# Altium PCB LightsaberBOPIT.PcbDoc
Units mil, origin at the board's own origin, x right, y up, seen from the top; angles counter-clockwise.
Board outline 2490 x 3395 mil, 2 copper layers (Top Layer, Bottom Layer); 10 components, 15 nets, 64 pads, 4 vias.
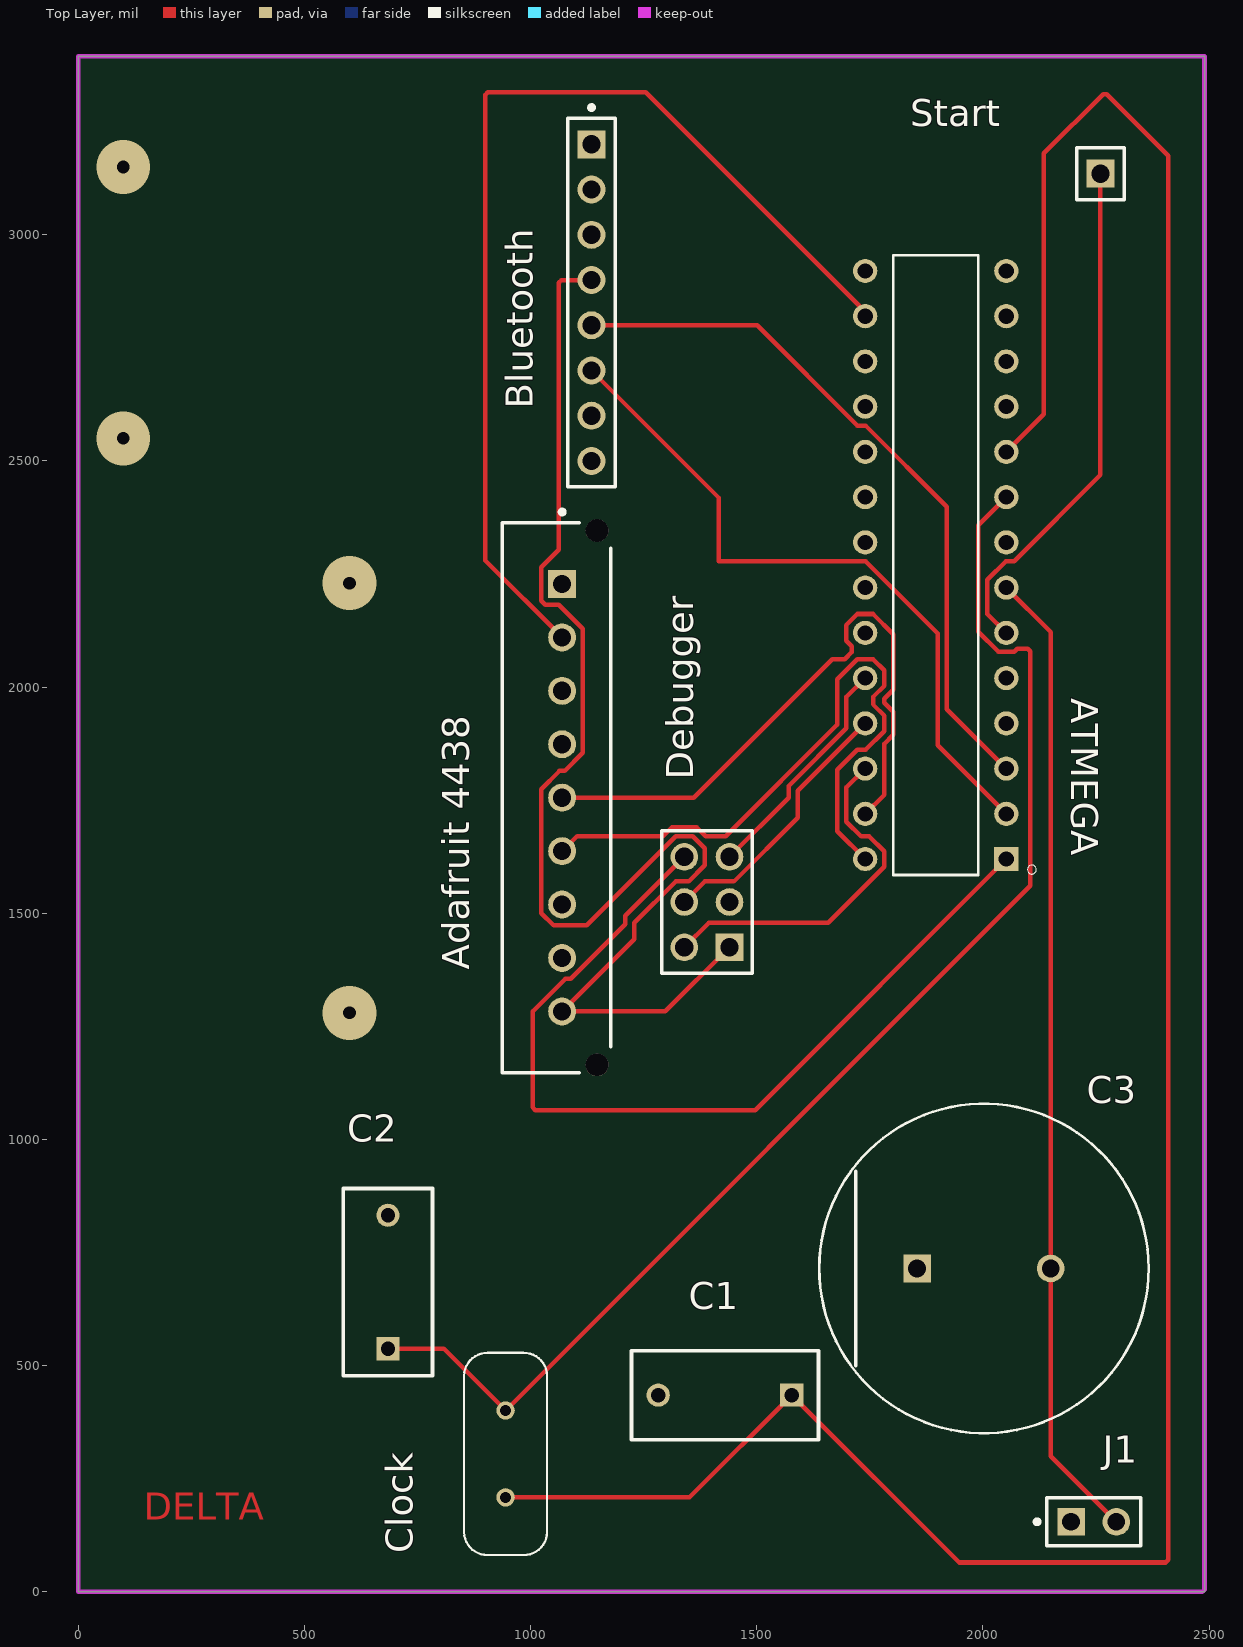
[diagram p0: Top Layer view]
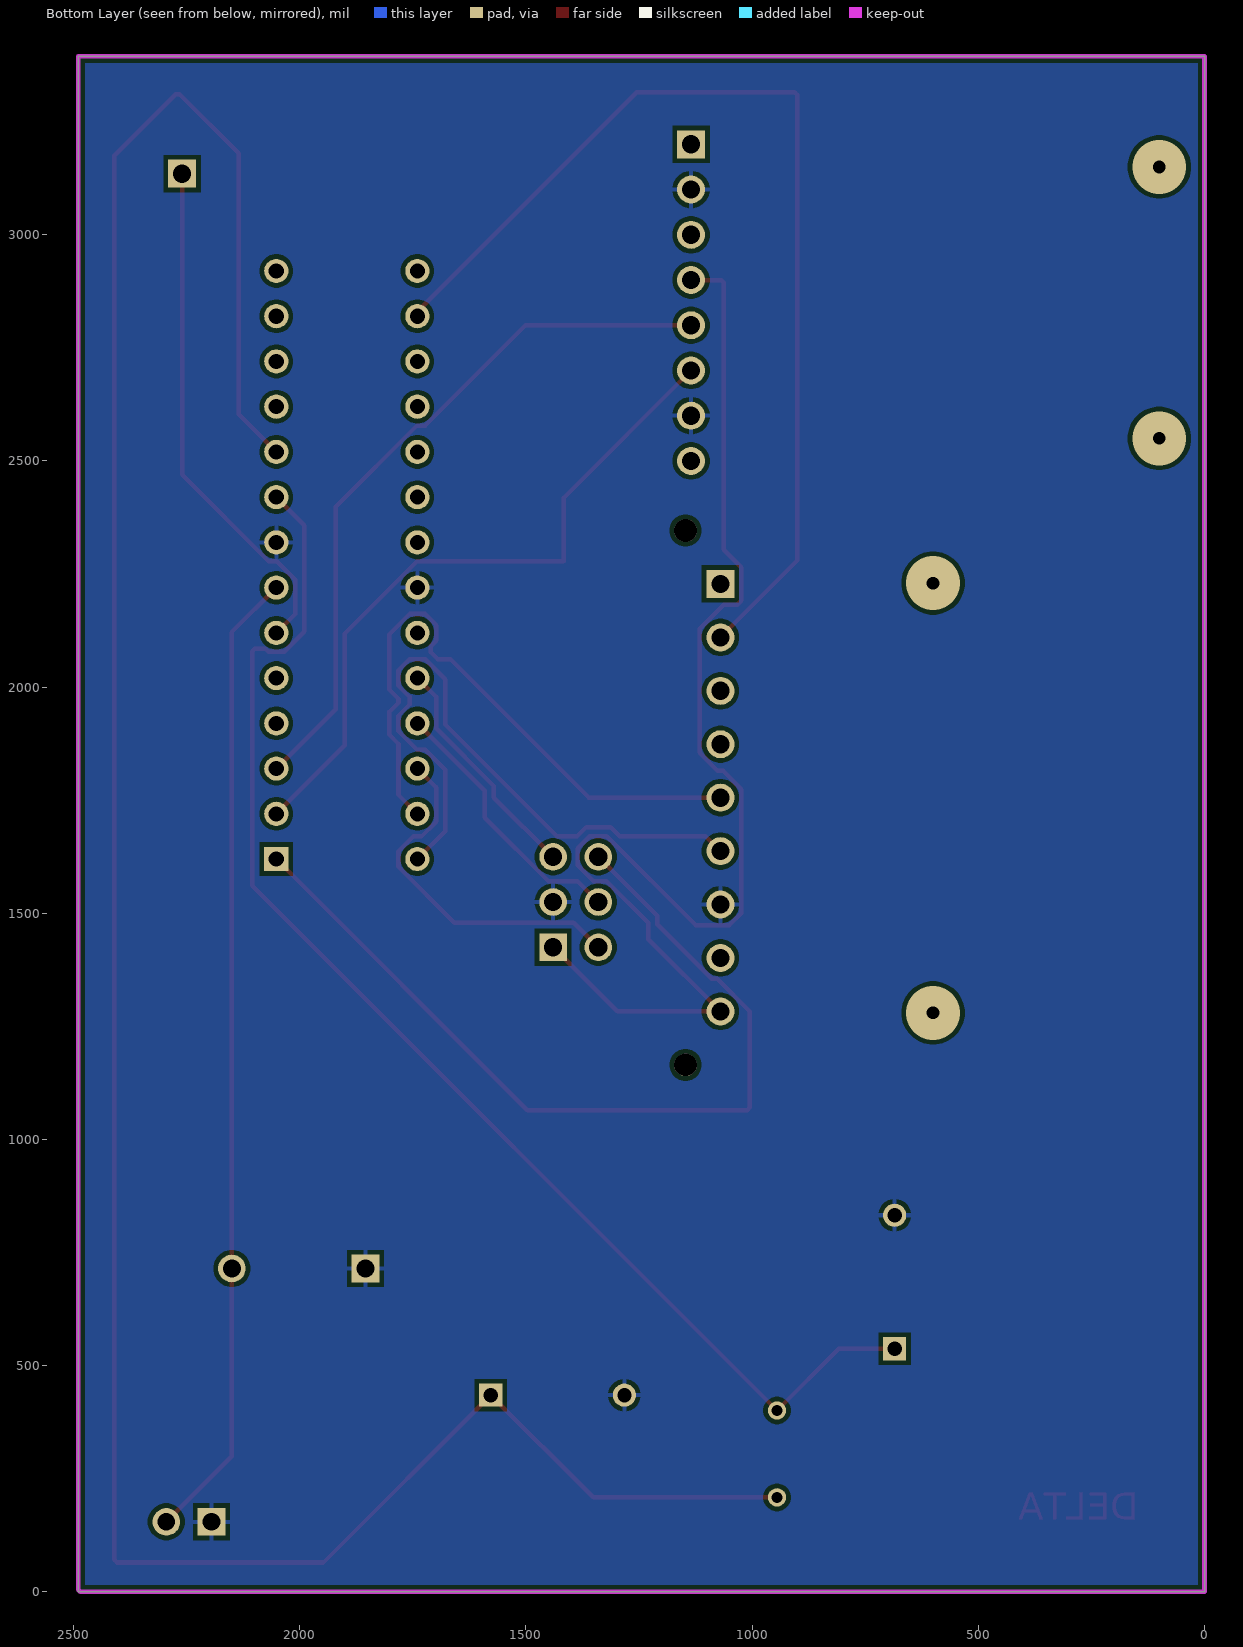
[diagram p1: Bottom Layer view, seen from below]
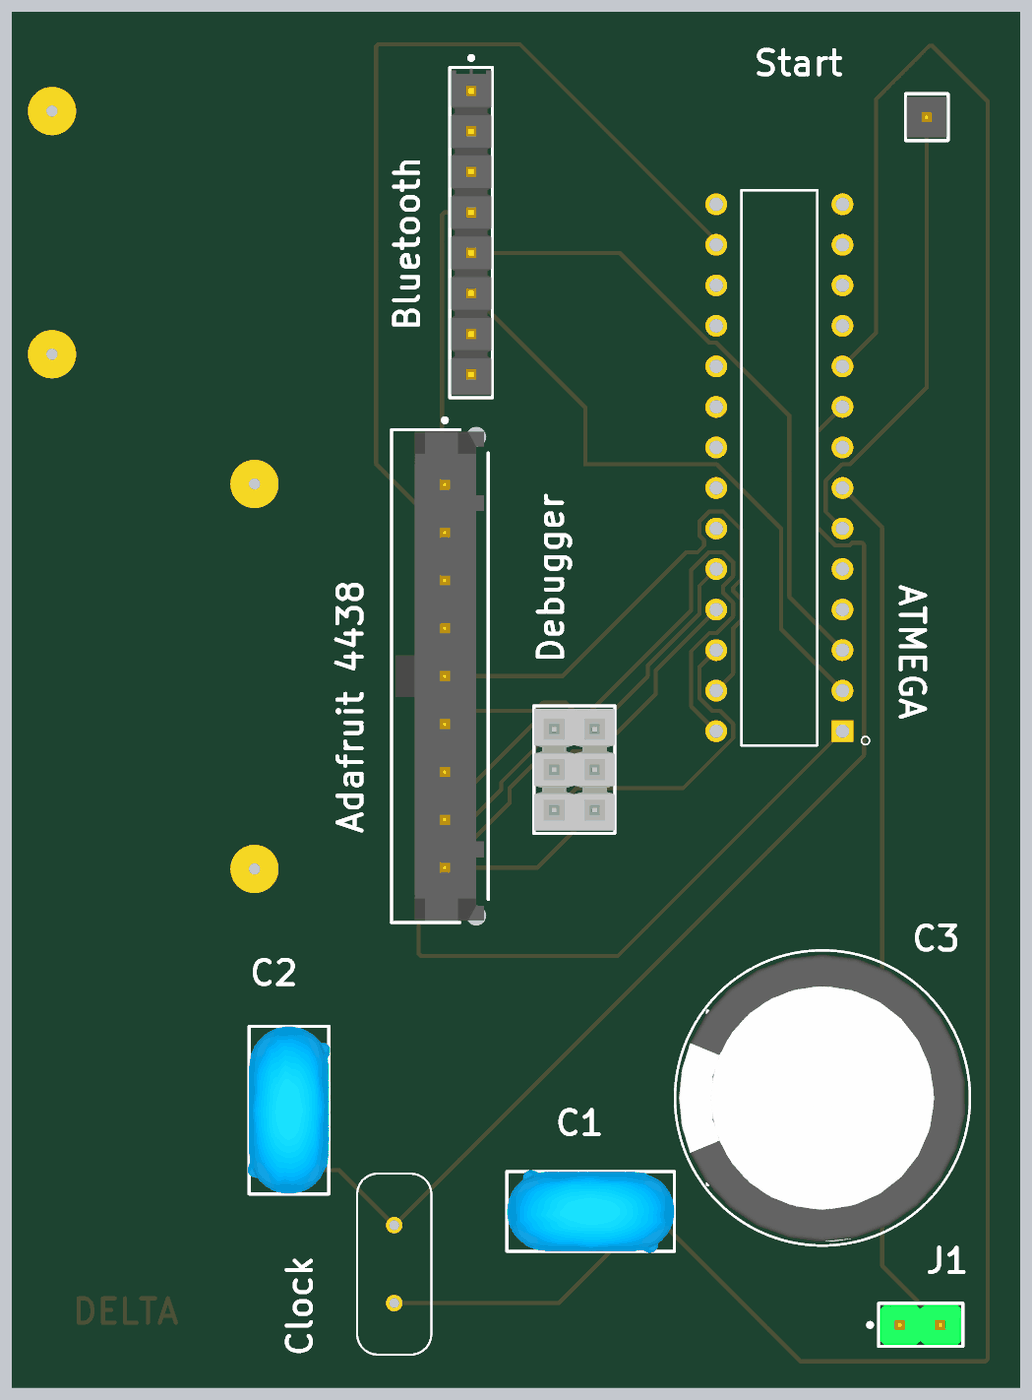
[diagram p2: 3D render of the assembled board from above, using the file's embedded part models]

## Layer stack, top to bottom
Top Solder: solder mask 0.4, Solder Resist, Dk 3.5
Top Layer: signal copper 1.4
Dielectric 1: dielectric 12.6, FR-4, Dk 4.8
Bottom Layer: signal copper 1.4
Bottom Solder: solder mask 0.4, Solder Resist, Dk 3.5

## Board outline
0,0 2490,0 2490,3395 0,3395

## Design rules (kind name [scope] priority, off if disabled: settings)
Clearance [All] p1: gap=10 ignorepadtopadclearanceinfootprint=FALSE
PolygonConnect [All] p1: connectstyle=Relief reliefconductorwidth=10 reliefentries=4 polygonreliefangle="90 Angle" airgapwidth=10
RoutingVias [All] p1: holewidth=28 width=50 viastyle="Through Hole" minholewidth=28 minwidth=50 maxholewidth=28 maxwidth=50
SolderMaskExpansion [All] p1: expansion=0 istentingtop=FALSE
SupplyNets "Schematic Supply Nets" [InNet('GND')] p1: voltage=0.000
Width [All] p1: maxlimit=10 minlimit=10 preferedwidth=10
30 further rules are at their usual default settings.

## Classes and differential pairs
component class Sheet1: " " "Adafruit 4438" C1 C2 C3 Clock Debugger J1 Start

## Components (designator, comment, footprint, x,y, rotation, side; value= is the part's Value field where it differs from the comment)
"Adafruit 4438" "43650-0916" FP-43650-0916-MFG 1057.6,1755.67 r90 top
ATMEGA "ATMEGA328P-PU" DIP794W46P254L2967H457Q28B 1895.91,2270 r180 top (schematic designator U?)
Bluetooth "TSW-108-08-G-S" FP-TSW-108-08-G-S-MFG 1135,2850 r270 top
C1 "CS11ZU2GA472MYGKA" FP-CS11ZU2GA472MYGKA-MFG 1430,435 r180 top
C2 "CS11ZU2GA472MYGKA" FP-CS11ZU2GA472MYGKA-MFG 685,685 r90 top
C3 "EEUFK1V332S" FP-RAD-TH-D_18_0_5-L_25_2-MFG 2002.36,715 r0 top (schematic designator C?)
Clock "ECS-184-18-4" XTAL_ECS-184-18-4 945,305 r270 top
Debugger "TSW-103-08-G-D" SMTC-TSW-103-08-X-D 1440,1425 r90 top
J1 "826629-2" FP-826629-2-MFG 2245,155 r0 top
Start "TSW-101-07-L-S" FP-TSW-101-07-L-S-MFG 2260,3135 r90 top

## Footprints (in the part's own frame and the unit in brackets; to place one, negate y for a bottom-side part, rotate by r counter-clockwise, add the part's x,y. Pads: shape width x height; smd on the part's side, far side on the other; paste and mask are expansions set on the pad)
DIP794W46P254L2967H457Q28B [mm]
  rect 1.358x1.358 hole 0.85: 1(-3.96,16.51)
  round 1.358 hole 0.85: 2(-3.96,13.97) 3(-3.96,11.43) 4(-3.96,8.89) 5(-3.96,6.35) 6(-3.96,3.81) 7(-3.96,1.27) 8(-3.96,-1.27) 9(-3.96,-3.81) 10(-3.96,-6.35) 11(-3.96,-8.89) 12(-3.96,-11.43) 13(-3.96,-13.97) 14(-3.96,-16.51) 15(3.96,-16.51) 16(3.96,-13.97) 17(3.96,-11.43) 18(3.96,-8.89) 19(3.96,-6.35) 20(3.96,-3.81) 21(3.96,-1.27) 22(3.96,1.27) 23(3.96,3.81) 24(3.96,6.35) 25(3.96,8.89) 26(3.96,11.43) 27(3.96,13.97) 28(3.96,16.51)
  silkscreen extent -5.65,-17.4 2.38,17.4
FP-43650-0916-MFG [mm]
  rect 1.57x1.57 hole 1.02 paste-2539.97 mask+0: 1(12,-0.315)
  round 1.57 hole 1.02 paste-2539.97 mask+0: 2(9,-0.315) 3(6,-0.315) 4(3,-0.315) 5(0,-0.315) 6(-3,-0.315) 7(-6,-0.315) 8(-9,-0.315) 9(-12,-0.315)
  round 1.27 hole 1.27 unplated paste-2539.97 mask+0: ""(-15,-2.275) ""(15,-2.275)
  silkscreen extent -15.44,-3.04 16.16,3.04, body extent -15.74,-3.14 15.74,3.14, height 0.25
FP-826629-2-MFG [mm]
  rect 1.55x1.55 hole 1 paste-2539.97 mask+0: 1(-1.27,0)
  round 1.55 hole 1 paste-2539.97 mask+0: 2(1.27,0)
  silkscreen extent -3.3,-1.35 2.64,1.35, body extent -2.74,-1.45 2.74,1.45, height 0.25
FP-CS11ZU2GA472MYGKA-MFG [mm]
  rect 1.3x1.3 hole 0.8 paste-2539.97 mask+0: 1(-3.75,0)
  round 1.3 hole 0.8 paste-2539.97 mask+0: 2(3.75,0)
  silkscreen extent -5.25,-2.5 5.25,2.5, body extent -5.35,-2.6 5.35,2.6, height 0.25
FP-RAD-TH-D_18_0_5-L_25_2-MFG [mm]
  rect 1.55x1.55 hole 1 paste-2539.97 mask+0: 1(-3.75,0)
  round 1.55 hole 1 paste-2539.97 mask+0: 2(3.75,0)
  silkscreen extent -9.25,-9.25 9.25,9.25, body extent -9.35,-9.35 9.35,9.35, height 0.25
FP-TSW-101-07-L-S-MFG [mm]
  rect 1.57x1.57 hole 1.02 paste-2539.97 mask+0: 1(0,0)
  silkscreen extent -1.46,-1.34 1.46,1.34, body extent -1.56,-1.44 1.56,1.44, height 0.25
FP-TSW-108-08-G-S-MFG [mm]
  rect 1.57x1.57 hole 1.02 paste-2539.97 mask+0: 1(-8.89,0)
  round 1.57 hole 1.02 paste-2539.97 mask+0: 2(-6.35,0) 3(-3.81,0) 4(-1.27,0) 5(1.27,0) 6(3.81,0) 7(6.35,0) 8(8.89,0)
  silkscreen extent -11.07,-1.34 10.35,1.34, body extent -10.45,-1.44 10.45,1.44, height 0.25
SMTC-TSW-103-08-X-D [mm] ".025 SQ Post Terminal Strip Assembly, 2x3 Pins, Vertical, 2.54mm Pitch, Male"
  rect 1.55x1.55 hole 1.02: 1(0,0)
  round 1.55 hole 1.02: 2(0,2.54) 3(2.54,0) 4(2.54,2.54) 5(5.08,0) 6(5.08,2.54)
  silkscreen extent -1.46,-1.27 6.54,3.81, body extent -1.27,-1.27 6.35,3.81, height 8.38
XTAL_ECS-184-18-4 [mm]
  round 1.03 hole 0.63: 1(-2.44,0) 2(2.44,0)
  silkscreen extent -5.68,-2.33 5.68,2.33

## Part data
"Adafruit 4438": library part CMP-00257-00277538-1, "43650-0916 Conn Power HDR 9 POS 3mm Solder ST Thru-Hole 9 Terminal 1 Port Micro-Fit 3.0™ Frame", Color=Black, Current Rating=5A, Manufacturer Lifecycle Status=ACTIVE, Max Operating Temperature=105°C, Max Voltage Rating (DC)=250.25kV, Min Operating Temperature=-40°C, Voltage Rating=600V, Connector Type="Male Pin", Contact Gender=Male, Contact Material=Brass, Contact Plating=Gold, Country of Origin=US, Fastening Type=Ramp, Gender=Male, Glow Wire Compliant=Compliant, Halogen Free="Low Halogen", Housing Color=Black, Housing Material=Thermoplastic, Lead Free="Contains Lead", Lead Pitch=3mm, Lifecycle Status=Production, Mount="Through Hole", NexarPartId=277538, Number of Circuits=9, Number of Contacts=9, Number of Positions=9, Number of Rows=1, Orientation=Vertical, Pitch=3mm, Plating=Tin, RoHS=Compliant, Schedule B=8536695050, Termination=Press-Fit
ATMEGA: "ATmega Series 20 MHz 32 KB Flash 2 KB SRAM 8-Bit Microcontroller - DIP-28", Package=None, Availability=Unavailable, MP=ATMEGA328P-PU, Price=None
Bluetooth: library part CMP-02766-000001-1, "CONN HEADER VERT 8POS 2.54MM", Manufacturer=Samtec, Temperature="-55°C to +125°C", Temperature Range High=+125°C, Temperature Range Low=-55°C, Automotive=No, Category=Conn, ComponentLink2Description=Datasheet, ComponentLink2URL=http://suddendocs.samtec.com/catalog_english/tsw_th.pdf, Conn Gender=Male, Conn Orientation=Straight, Contact Material=Gold,Nickel, Device Class L1=Connectors, Device Class L2="Headers and Wire Housings", Device Class L3=unset, Digikey Description="CONN HEADER VERT 8POS 2.54MM", Footprint Url=http://suddendocs.samtec.com/prints/tsw-xxx-xx-x-x-xx-xxx-footprint.pdf, Height=8.71mm, Lead Free=Yes, Manufacturer Part Number=TSW-108-08-G-S, Mouser Description="TSW - Samtec 2.54mm Pin Header 13.46mm Overall Pin Length 5.08mm Tail", Number of Contacts=8, Number of Rows=1, Octopart=https://octopart.com/tsw-108-08-g-s-samtec-272653, Package=TSW-108-08-G-S, Pitch=2.54mm, RoHS=TRUE
C1 C2: library part CMP-00600-33723007-1, "CS11ZU2GA472MYGKA Cap Ceramic 0.0047uF 440VAC Z5U 20% (10.5 X 5mm) Radial 7.5mm 125°C T/R", Capacitance=4.7nF, Case/Package=Radial, Manufacturer Lifecycle Status="PRODUCTION (NOT RECOMMENDED FOR NEW DESIGN)", Max Operating Temperature=125°C, Min Operating Temperature=-40°C, Ratings="AEC-Q200, X1, Y2", Tolerance=20%, Height=14.5mm, Height - Seated (Max)=14.5034mm, Lead Pitch=7.493mm, Lead/Base Style=Straight, Lifecycle Status=NRND, Material=Ceramic, Max Thickness=5mm, Mount="Through Hole", NexarPartId=33723007, Packaging=Bulk, RoHS=Compliant, Thickness=5.0038mm
C3: library part CMP-05427-000163-1, "Aluminum Electrolytic Capacitors (Radial Lead Type) AEC-Q200 Qualified 3300uF ±20% 35V", Capacitance=3.3mF, Case/Package=Radial, Dielectric Material=Aluminium, Max Operating Temperature=105°C, Min Operating Temperature=-55°C, Package Quantity=50, Ripple Current=2.85A, Tolerance=20%, Voltage=35V, Construction=RADIAL, Diameter=18mm, Height=25mm, Lead Diameter=0.8mm, Lead Pitch=7.5mm, Length=25mm, Life (Hours)=5000Hour, Mount="Through Hole", Number of Pins=2, Packaging=Bulk, Radiation Hardening=No, REACH SVHC="No SVHC", RoHS Compliant=Yes, Series=FK, Termination=Radial, Voltage Rating=35V, Voltage Rating (DC)=35V
Clock: Package=None, Availability=Unavailable, MP=ECS-184-18-4, Price=None
Debugger: library part CMP-1024-00338-1, "0.025\" SQ Post Header, Through-hole, Vertical, -55 to 125 degC, 2.54 mm Pitch, 6-Pin, Male, RoHS", Manufacturer=Samtec, Temperature Range="-55 to 125 degC", ComponentLink1Description="Manufacturer URL", ComponentLink1URL=http://www.samtec.com, ComponentLink2Description=Datasheet, ComponentLink2URL=http://www.samtec.com/documents/webfiles/pdf/TSW_TH.PDF, ComponentLink3Description="Package Specification", ComponentLink3URL=http://www.samtec.com/documents/webfiles/cpdf/TSW-XXX-XX-XXX-X-XX-XXX-MKT.pdf, DatasheetVersion=F-214, Mounting Technology=Through-hole, Orientation=Vertical, PackageDescription=".025[0.64] SQ. Post Terminal Strip Assembly", PackageReference=TSW-103-08-X-D, PackageVersion="DM, 8/1988", PartNumber=TSW-103-08-G-D, Pitch="2.54 mm", RoHS=True
J1: library part CMP-05178-000003-1, "CONN HEADER VERT 2POS 2.54MM", RoHS Compliant=Yes
Start: library part CMP-02766-001775-1, "CONN HEADER VERT 1POS", Color=Black, Flammability Rating="UL94 V-0", Max Current Rating=7.6A, Max Operating Temperature=125°C, Max Voltage Rating (AC)=550V, Min Operating Temperature=-55°C, Connector Type=Header, Contact Finish - Mating=GOLD, Contact Material=Bronze, Contact Mating Length=0.23inch, Contact Plating=Gold, Contact Shape=Square, Contact Type="Male Pin", Depth=2.54mm, Fastening Type=Pull, Gender=Male, Housing Color=Black, Housing Material=Polyester, Insulation Color=Black, Insulation Material=PBT, Lead Free="Lead Free", Length=2.54mm, Mount="Through Hole", Number of Contacts=1, Number of Positions=1, Number of Rows=1, Orientation=Straight, Packaging=Bulk, Radiation Hardening=No, Reach SVHC Compliant=Yes, RoHS Compliant=Yes, Series=TSW, Termination=Solder, Width=2.54mm

## Via types
v1: diameter 119, hole 28, Top Layer to Bottom Layer, 4 vias

## Nets (pads, with @x,y where several pads share a name; then routed paths per layer and width w, separated by ;. In a path a pad name is that pad's centre, name@x,y a point inside that pad or via, vN(x,y) a via of type N, cw(c..) or ccw(c..) an arc to the next point about the centre after c; other vN are vias at no path point)
GND: "Adafruit 4438.7" ATMEGA.8 ATMEGA.22 Bluetooth.2 Bluetooth.7 C1.2 C2.2 C3.1 Debugger.3 J1.1
"NetAdafruit 4438_2": "Adafruit 4438.2" ATMEGA.16 | length 2322.9
  Top Layer w10: 1070,2110 900,2280 900,3309.14 905.86,3315 1255,3315 1740,2830 ATMEGA.16
"NetAdafruit 4438_5": "Adafruit 4438.5" ATMEGA.27 | length 1409.7
  Top Layer w10: 1070,1755.67 1360.67,1755.67 1666.73,2061.73 1694.43,2061.73 1710.29,2077.59 1710.29,2090.69 1698.27,2102.71 1698.27,2137.29 1722.71,2161.73 1757.29,2161.73 1801.73,2117.29 1801.73,1994.43 1781.73,1974.43 1781.73,1965.57 1801.73,1945.57 1801.73,1894.43 1781.73,1874.43 1781.73,1761.73 ATMEGA.27
"NetAdafruit 4438_6": "Adafruit 4438.6" ATMEGA.28 | length 1489.2
  Top Layer w10: 1070,1637.56 1102.95,1670.51 1292.86,1670.51 1312.86,1690.51 1367.14,1690.51 1387.14,1670.51 1431.49,1670.51 1678.27,1917.29 1678.27,2017.29 1722.71,2061.73 1757.29,2061.73 1781.73,2037.29 1781.73,2002.71 1757.29,1978.27 1757.29,1961.73 1781.73,1937.29 1781.73,1902.71 1740.75,1861.73 1722.71,1861.73 1678.27,1817.29 1678.27,1681.73 ATMEGA.28
"NetAdafruit 4438_9": "Adafruit 4438.9" Bluetooth.4 Debugger.1 | length 2986.9
  Top Layer w10: Bluetooth.4 1068.57,2900 1062.72,2894.14 1062.72,2303.85 1024.09,2265.23 1024.09,2190.99 1032.88,2182.2 1062.72,2182.2 1115.91,2129.01 1115.91,1854.76 1075.86,1814.72 1064.13,1814.72 1024.09,1774.68 1024.09,1500.43 1050.99,1473.54 1124.18,1473.54 1321.15,1670.51 1358.85,1670.51 1385.51,1643.85 1385.51,1606.15 1349.88,1570.51 1321.15,1570.51 1229.63,1478.99 1229.63,1442.85 1070,1283.23 1298.23,1283.23 Debugger.1
NetBluetooth_5: ATMEGA.3 Bluetooth.5 | length 1584.7
  Top Layer w10: Bluetooth.5 1500.98,2800 1722.71,2578.27 1740.75,2578.27 1920.39,2398.63 1920.39,1951.42 ATMEGA.3
NetBluetooth_6: ATMEGA.2 Bluetooth.6 | length 1549.6
  Top Layer w10: Bluetooth.6 1416.73,2418.27 1416.73,2278.27 1740.75,2278.27 1900.39,2118.63 1900.39,1871.42 ATMEGA.2
NetC1_1: ATMEGA.10 C1.1 Clock.2 | length 5898.4
  Top Layer w10: Clock.2 1351.57,208.94 C1.1 1947.64,65 2404.14,65 2410,70.86 2410,3175 2274.14,3310.86 2265.86,3310.86 2135,3180 2135,2603.19 ATMEGA.10
NetC2_1: ATMEGA.9 C2.1 Clock.1 | length 2936.4
  Top Layer w10: C2.1 808.7,537.36 Clock.1 2105,1561.06 2105,2079.14 2099.14,2085 2075.83,2085 2069.1,2078.27 2034.53,2078.27 1990.08,2122.71 1990.08,2358.27 ATMEGA.9
NetC?_2: ATMEGA.7 C3.2 J1.2 | length 2165.7
  Top Layer w10: ATMEGA.7 2150,2121.81 C3.2 2150,300 J1.2
NetDebugger_2: ATMEGA.26 Debugger.2 | length 795.1
  Top Layer w10: Debugger.2 1394.49,1479.49 1658.51,1479.49 1781.73,1602.71 1781.73,1637.29 1749.02,1670 1730.98,1670 1698.27,1702.71 1698.27,1778.27 ATMEGA.26
NetDebugger_4: ATMEGA.25 Debugger.4 | length 598.4
  Top Layer w10: Debugger.4 1385.51,1570.51 1449.88,1570.51 1590.78,1711.42 1590.78,1770.78 ATMEGA.25
NetDebugger_5: ATMEGA.24 Debugger.5 | length 519.3
  Top Layer w10: Debugger.5 1570.78,1755.78 1570.78,1781.51 1698.27,1909 1698.27,1978.27 ATMEGA.24
NetDebugger_6: ATMEGA.1 Debugger.6 | length 1978.9
  Top Layer w10: Debugger.6 1209.63,1494.63 1209.63,1476.04 1089.01,1355.43 1077.28,1355.43 1005,1283.15 1005,1070.86 1010.86,1065 1496.81,1065 ATMEGA.1
NetStart_1: ATMEGA.6 Start.1 | length 1146.4
  Top Layer w10: ATMEGA.6 2010.08,2161.73 2010.08,2237.29 2051.06,2278.27 2069.1,2278.27 2260,2469.17 Start.1
pads on no net: "Adafruit 4438.1" "Adafruit 4438.3" "Adafruit 4438.4" "Adafruit 4438.8" "Adafruit 4438." ATMEGA.4 ATMEGA.5 ATMEGA.11 ATMEGA.12 ATMEGA.13 ATMEGA.14 ATMEGA.15 ATMEGA.17 ATMEGA.18 ATMEGA.19 ATMEGA.20 ATMEGA.21 ATMEGA.23 Bluetooth.1 Bluetooth.3 Bluetooth.8
copper on no net:
  other v1: 600,1280 600,2230 100,2550 100,3150

## Polygon pours and split planes (outlines as drawn)
GND on Bottom Layer "GND_L02_P000" (solid, pour order 0): 0,3395 0,0 2490,0 2490,3395 2450,3395

## Keep-outs
Keep-Out Layer:
  lines w10: 0,0 0,3395 2490,3395 2490,5 2485,0 0,0

## Other copper
Top Layer:
  text "DELTA" at 145,160 h60